# Altium PCB F407.PcbDoc (part 2 of 12)
Units mil, origin at the board's own origin, x right, y up, seen from the top; angles counter-clockwise.
Board outline 6062.25 x 4305.79 mil, 2 copper layers (Top Layer, Bottom Layer); 68 components, 138 nets, 423 pads, 108 vias.
Unrouted connection lines stored in the file: 2.
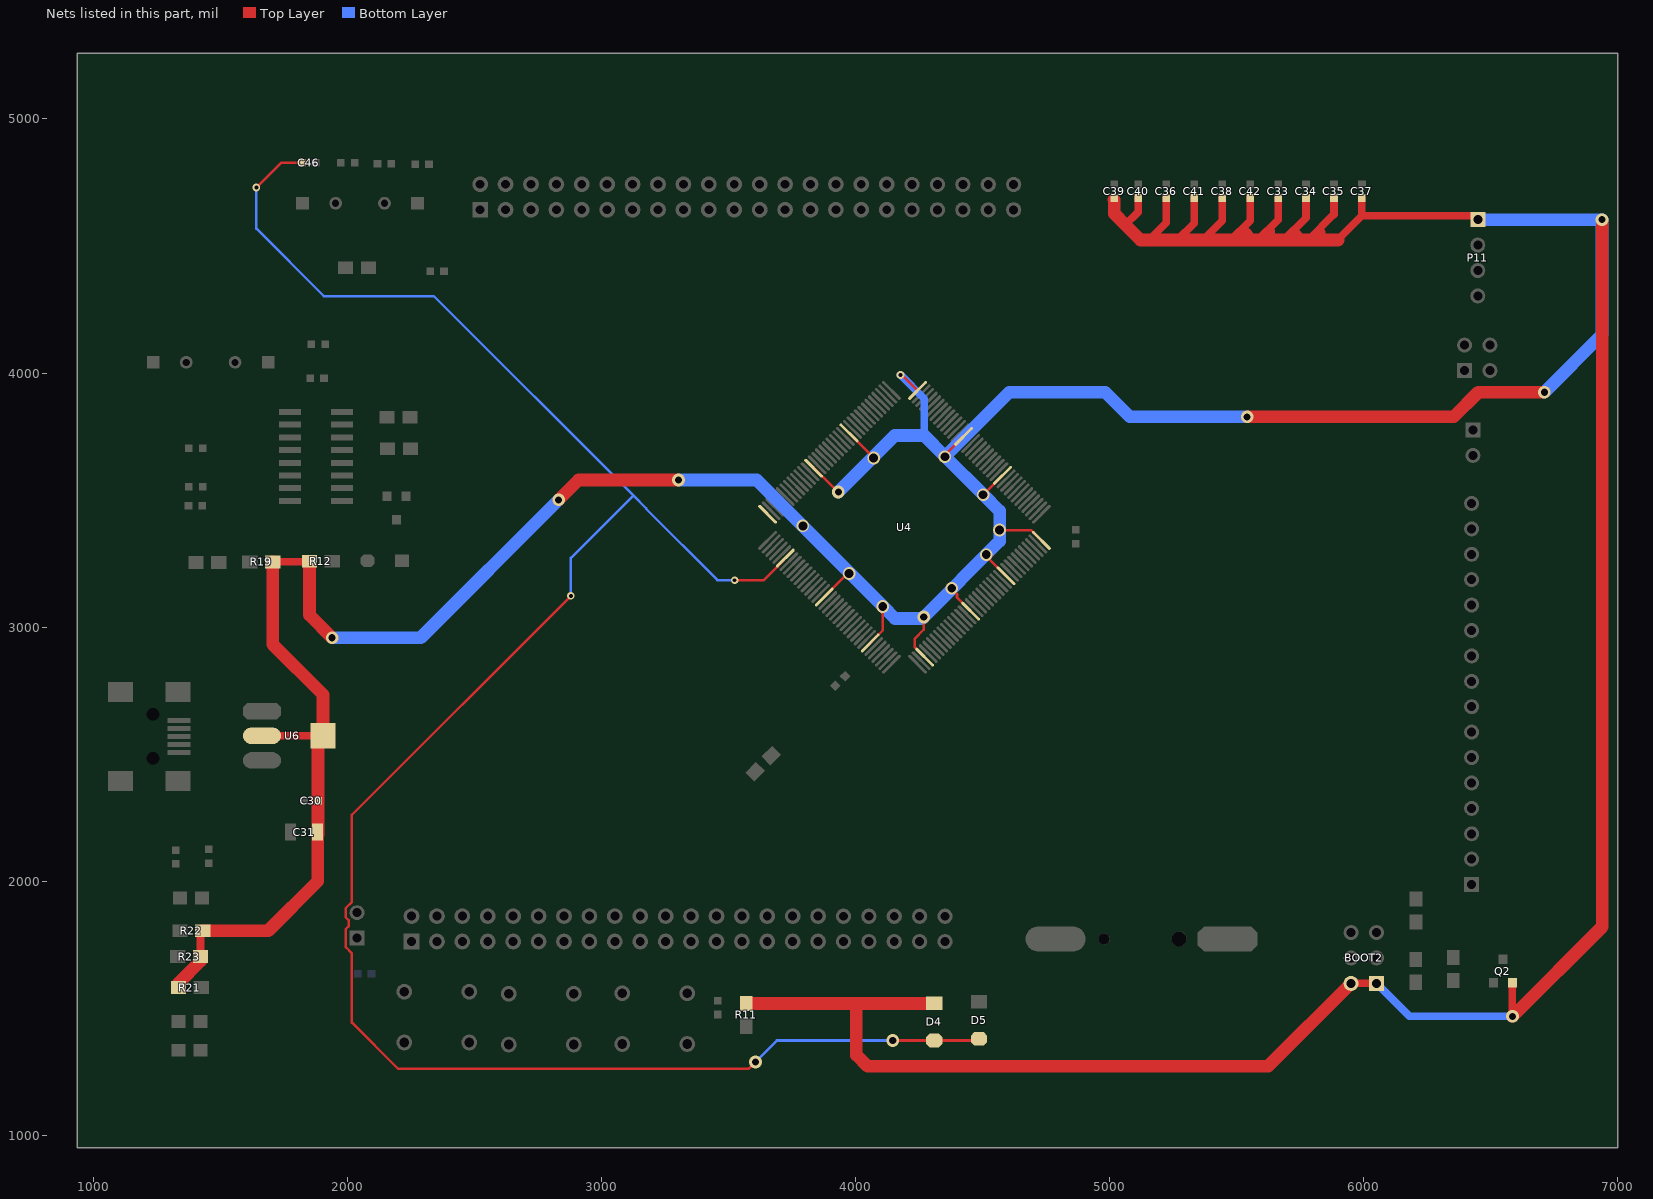
[diagram p2: the nets of this part, all layers, seen from the top]

## Via types
v1: diameter 30, hole 15, Top Layer to Bottom Layer, 48 vias
v2: diameter 50, hole 28, Top Layer to Bottom Layer, 42 vias
v3: diameter 50, hole 35, Top Layer to Bottom Layer, 9 vias
v4: diameter 20, hole 10, Top Layer to Bottom Layer, 8 vias
v5: diameter 50, hole 30, Top Layer to Bottom Layer, 1 vias

## Nets (pads, with @x,y where several pads share a name; then routed paths per layer and width w, separated by ;. In a path a pad name is that pad's centre, name@x,y a point inside that pad or via, vN(x,y) a via of type N, cw(c..) or ccw(c..) an arc to the next point about the centre after c; other vN are vias at no path point) (continued)
VBAT: C46.1 D4.2 D5.2 U4.6 | length 8228.8
  Top Layer w10: v1(1642.65,4730.17) 1740.43,4827.95 C46.1@1820.72,4827.95 ; v1(2880.03,3123.36) 2018.64,2261.97 2018.64,1919.41 1994.06,1894.84 1994.06,1857.95 2006.19,1845.82 2006.19,1824.26 1994.06,1812.13 1994.06,1740.65 2018.64,1716.07 2018.64,1443.6 2200.74,1261.5 3578.6,1261.5 v2(3606.39,1289.29) ; v1(3524.56,3184.99) 3639.27,3184.99 3717.44,3263.16 3717.44,3265.84 U4.6@3723.72,3272.12 ; v2(4146.88,1373.47) D4.2@4309.74,1373.47 4479.87,1373.47 D5.2@4486.29,1379.89
  Bottom Layer w10: v1(1642.65,4730.17) 1642.65,4568.35 1908.51,4302.49 2341.33,4302.49 3125.75,3518.07 ; v1(2880.03,3123.36) 2880.03,3272.35 3125.75,3518.07 ; v1(3524.56,3184.99) 3456.91,3184.99 3176.65,3465.25 3176.65,3467.17 3125.75,3518.07 ; v2(3606.39,1289.29) 3690.57,1373.47 v2(4146.88,1373.47)
VCC3.3: BOOT2.1 BOOT2.2 C30.2 C31.1 C33.2 C34.2 C35.2 C36.2 C37.2 C38.2 C39.2 C40.2 C41.2 C42.2 D4.1 P11.1 Q2.1 R11.2 R12.2 R19.2 R21.2 R22.2 R23.2 U4.17 U4.30 U4.39 U4.52 U4.62 U4.72 U4.84 U4.95 U4.108 U4.121 U4.131 U4.144 U6.2 U6.4 | length 269638.1
  Top Layer w10: U4.131@3836.42,3626.56 3930.6,3532.37 v2(3932.56,3532.37) ; U4.17@3876.61,3119.22 3968.61,3211.22 v3(3975.12,3211.22) ; U4.121@3974.5,3764.64 4071.64,3667.49 v3(4071.64,3665.48) ; U4.30@4058.9,2936.94 4064.76,2942.79 4064.76,2945.02 4107.55,2987.81 v3(4107.55,3081.78) ; v1(4177.34,3992.59) 4183.62,3992.59 U4.108@4244.09,3932.12 ; U4.39@4238.51,2916.45 4232.99,2921.97 4232.99,2954.28 4268.89,2990.18 v2(4268.89,3040.19) ; v3@4348.68,3673.91 4418.51,3743.75 U4.95@4414.68,3743.75 ; v3@4379.13,3150.08 4399.61,3129.6 4399.61,3116.81 4447.24,3069.18 4447.24,3068.74 U4.52@4453.1,3062.88 ; v3(4502.46,3521.09) 4578.6,3597.23 U4.84@4578.6,3597.61 ; v3@4511.98,3282.84 U4.62@4592.52,3202.3 ; v3@4514.71,3288.58 v3(4514.71,3285.57) 4533.14,3285.57 v3@4535.7,3283 ; v3(4566.93,3382.77) 4568.36,3381.41 4692.24,3381.41 U4.72@4731.94,3341.71